# Altium PCB 002-0081 Rev -_wrong_layout.PcbDoc
Units mil, origin at the board's own origin, x right, y up, seen from the top; angles counter-clockwise.
Board outline 2675 x 3040 mil, 2 copper layers (Top Layer, Bottom Layer), stack 21 mil thick; 61 components, 35 nets, 171 pads, 34 vias.
Unrouted connection lines stored in the file: 23.
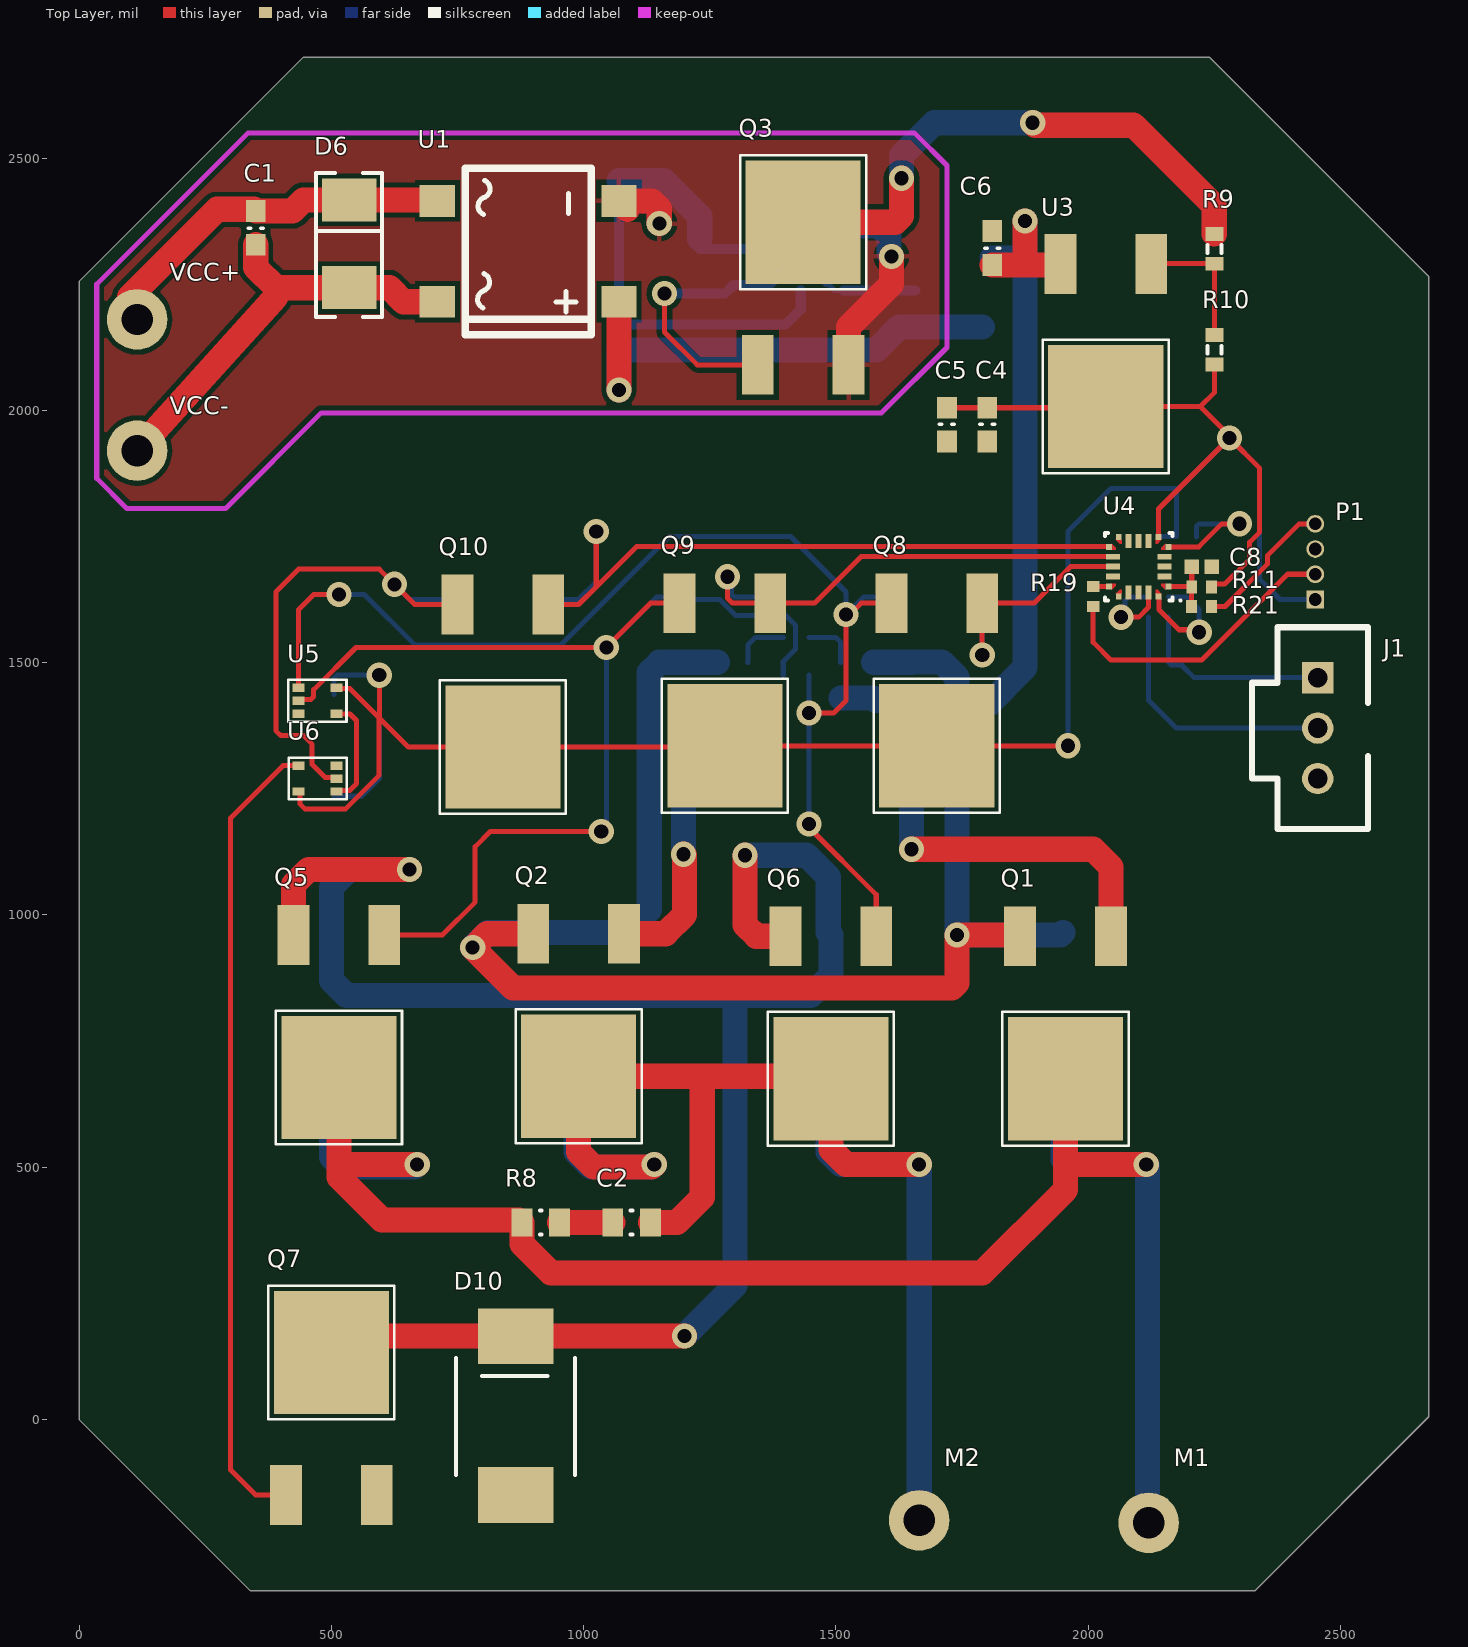
[diagram p0: Top Layer view]
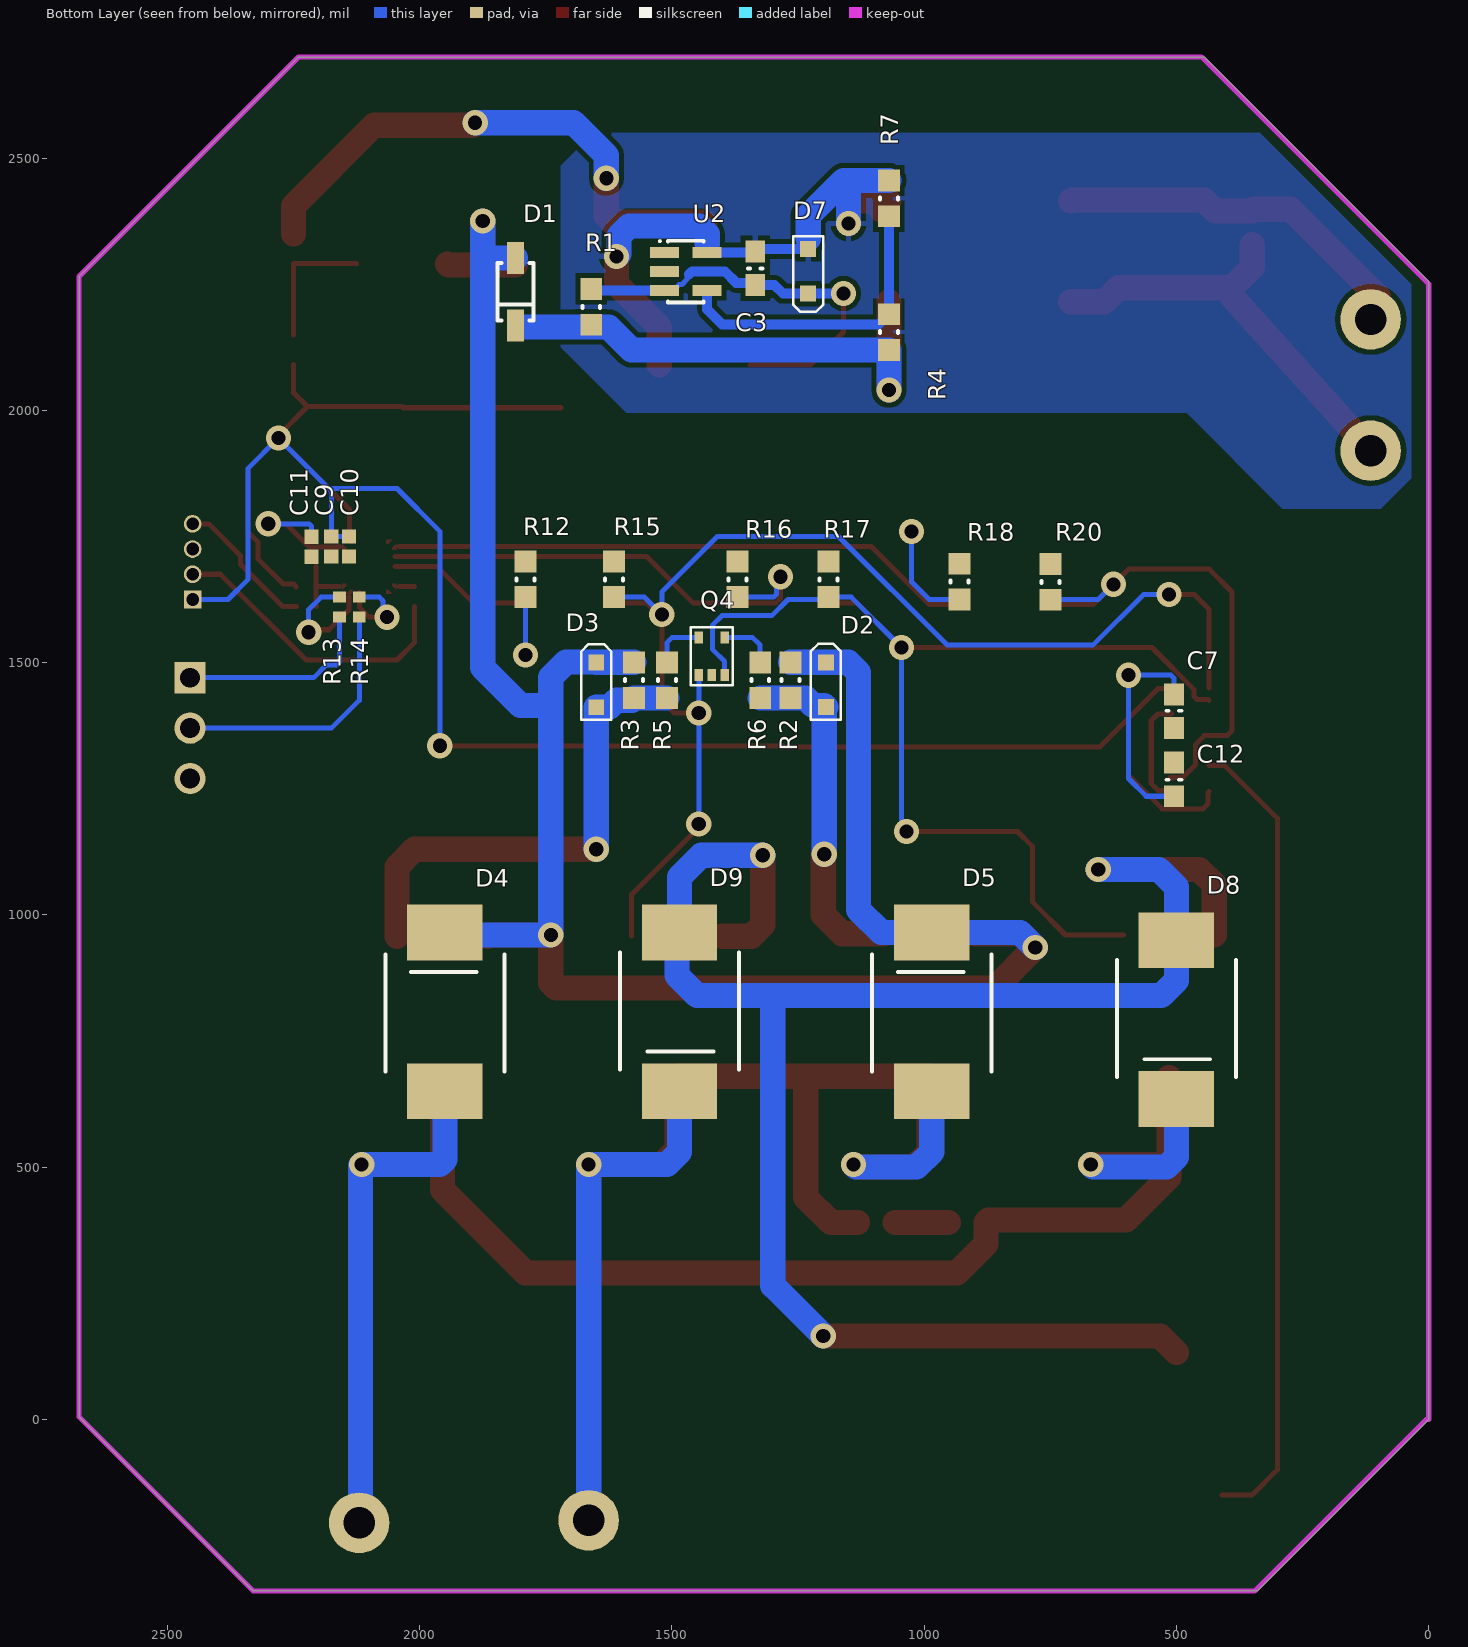
[diagram p1: Bottom Layer view, seen from below]

## Layer stack, top to bottom
Top Solder: solder mask 0.4, Solder Resist, Dk 3.5
Top Layer: signal copper 1.4
Dielectric 2: prepreg 2.8, PP-006, Dk 4.1
Dielectric 1: dielectric 12.6, FR-4, Dk 4.8
Dielectric 3: prepreg 2.8, PP-006, Dk 4.1
Bottom Layer: signal copper 1.4
Bottom Solder: solder mask 0.4, Solder Resist, Dk 3.5

## Board outline
340,-340 0,0 0,2255 445,2700 2240,2700 2675,2265 2675,5 2330,-340

## Design rules (kind name [scope] priority, off if disabled: settings)
Clearance Clearance_2 [HasFootprint('UFQFPN20_V')] p1: gap=10 ignorepadtopadclearanceinfootprint=TRUE except(0: Arc-Poly Arc-Region Track-Poly Track-Region SMDPad-Poly SMDPad-Region THPad-Poly THPad-Region Via-Poly Via-Region Fill-Poly Fill-Region Poly-Poly Poly-Region Region-Region; 7: Track-SMDPad)
Clearance Clearance_3 [HasFootprint('SOT-353') vs HasFootprint('SOT-353')] p2: gap=10 ignorepadtopadclearanceinfootprint=TRUE except(0: Arc-Hole Track-Hole SMDPad-Hole THPad-Hole Via-Hole Fill-Hole Poly-Hole Region-Hole Text-Hole)
Clearance Clearance_1 [All] p3: gap=10 ignorepadtopadclearanceinfootprint=FALSE except(0: Arc-Hole Track-Hole SMDPad-Hole THPad-Hole Via-Hole Fill-Hole Poly-Hole Region-Hole Text-Hole)
PolygonConnect [All] p1: connectstyle=Relief reliefconductorwidth=10 reliefentries=4 polygonreliefangle="90 Angle" airgapwidth=10
RoutingVias [All] p1: holewidth=28 width=50 viastyle="Through Hole" minholewidth=28 minwidth=50 maxholewidth=28 maxwidth=50
SilkToSolderMaskClearance SilkToSolderMaskClearance_1 [IsPad] p1: minsilkscreentomaskgap=7 clearancetoexposedcopper=TRUE
SilkToSolderMaskClearance [HasFootprint('UFQFPN20_V')] p2: minsilkscreentomaskgap=7 clearancetoexposedcopper=TRUE
SolderMaskExpansion [All] p1: expansion=4
Width [All] p1: maxlimit=80 minlimit=10 preferedwidth=10
29 further rules are at their usual default settings.

## Components (designator, comment, footprint, x,y, rotation, side; value= is the part's Value field where it differs from the comment)
C1 "0.01 UF, 50V" 0603 350,2395 r270 top
C2 "Cap" RESC0805(2012)_N 1095,390 r180 top value="0.1uF 100V"
C3 "Cap" 0603 1335,2315 r270 bottom value="1000pF 50V"
C4 "Cap" 0603 1800,1938.07 r90 top value="0.1uF 50V"
C5 "Cap" 0603 1720,1938.07 r90 top value="1uF 50V"
C6 "Cap" 0603 1810,2355 r270 top value="0.1uF 50V"
C7 "Cap" 0603 505,1370 r90 bottom value="0.1uF, 10V"
C8 "Cap" CAPC0402(1005)60_M 2225,1690 r180 top value=0.1uF
C9 "Cap" CAPC0402(1005)60_M 2214.37,1729.37 r90 bottom value=0.68uF
C10 "Cap" CAPC0402(1005)60_M 2140,1730 r90 bottom value=0.1uF
C11 "Cap" CAPC0402(1005)60_M 2175,1730 r90 bottom value=1uF
C12 "Cap" 0603 505,1301.93 r270 bottom value="0.1uF, 10V"
D1 "MBR0540" SOD123/X.85 1810,2235 r270 bottom
D2 "MM3Z8V2B" SOD-323F 1195,1411.85 r90 bottom
D3 "MM3Z8V2B" SOD-323F 1650,1411.42 r90 bottom
D4 "SK510L-TP" SMC 1950,650.04 r90 bottom
D5 "SK510L-TP" SMC 985,650.04 r90 bottom
D6 "TVS DIODE 28VWM 45.4VC SMB" "108x85 Space 89 Diode" 535,2330 r90 top
D7 "MM3Z8V2B" SOD-323F 1230,2320 r270 bottom
D8 "SK510L-TP" SMC 500,949.96 r270 bottom
D9 "SK510L-TP" SMC 1485,965 r270 bottom
D10 "SK510L-TP" SMC 865,-150 r90 top
J1 "RS232 Conn" SCON3/.10 2455,1470 r90 top
P1 "4 Pin Connector" "4 PIN IN-LINE" 2450,1625 r180 top
Q1 "AOD4189" "DPAK (TO-252-3)" 2045,957.68 r180 top
Q2 "AOD4189" "DPAK (TO-252-3)" 1080,962.68 r180 top
Q3 "FQD16N25CTM" "DPAK (TO-252-3)" 1345,2090 r0 top
Q4 "DMN32D2LDF-7" SOT-353 1395.6,1550 r0 bottom
Q5 "AOD454A" "DPAK (TO-252-3)" 605,960 r180 top
Q6 "AOD454A" "DPAK (TO-252-3)" 1580,957.68 r180 top
Q7 "AOD454A" "DPAK (TO-252-3)" 410,-150 r0 top
Q8 "AOD454A" "DPAK (TO-252-3)" 1790,1617.68 r180 top
Q9 "AOD454A" "DPAK (TO-252-3)" 1370,1617.68 r180 top
Q10 "AOD454A" "DPAK (TO-252-3)" 930,1615 r180 top
R1 "Res3" RESC0603(1608)_M 1660,2205 r270 bottom value=1K
R2 "Res1" RESC0603(1608)_M 1265,1465 r270 bottom value=10K
R3 "Res1" RESC0603(1608)_M 1575,1465 r270 bottom value=10K
R4 "Res1" RESC0603(1608)_M 1070,2155 r90 bottom value=100K
R5 "Res1" RESC0603(1608)_M 1510,1465 r270 bottom value=1K
R6 "Res1" RESC0603(1608)_M 1325,1465 r90 bottom value=1K
R7 "Res1" RESC0603(1608)_M 1070,2420 r90 bottom value=3.3K
R8 "Res1" RESC0805(2012)_N 915,390 r180 top value="49.9 Ohm"
R9 "Res3" J1-0603 2250,2320 r270 top value=10K
R10 "Res3" J1-0603 2250,2120 r270 top value=3.3K
R11 "Res1" RESC0402(1005)_N 2225,1650 r0 top value=1k
R12 "Res1" RESC0603(1608)_M 1790,1665 r90 bottom value=10K
R13 "Res1" RESC0402(1005)_N 2159.06,1610 r270 bottom value=221
R14 "Res1" RESC0402(1005)_N 2119.68,1610 r270 bottom value=221
R15 "Res1" RESC0603(1608)_M 1615,1665 r90 bottom value=10K
R16 "Res1" RESC0603(1608)_M 1370,1665 r90 bottom value=10K
R17 "Res1" RESC0603(1608)_M 1190,1665 r90 bottom value=10K
R18 "Res1" RESC0603(1608)_M 930,1660.43 r90 bottom value=10K
R19 "Res1" RESC0402(1005)_N 2010,1630.94 r270 top value=100
R20 "Res1" RESC0603(1608)_M 750,1660 r90 bottom value=10K
R21 "Res1" RESC0402(1005)_N 2224.68,1611.26 r0 top value=100
U1 "DF01S" "Rectifier -DF005S" 890,2315 r270 top
U2 "LMV431ACM5/NOPB" DBV005 1515,2312.4 r270 bottom
U3 "LM317MDTXM" "DPAK (TO-252-3)" 2125,2290 r180 top
U4 "STM8S003F3_1" UFQFPN20_V 2100,1690 r180 top
U5 "74AHC1G86SE-7" SOT-353 510,1398.82 r90 top
U6 "74AHCT1G08SE-7" SOT-353 435.2,1295.59 r270 top

## Footprints (in the part's own frame and the unit in brackets; to place one, negate y for a bottom-side part, rotate by r counter-clockwise, add the part's x,y. Pads: shape width x height; smd on the part's side, far side on the other; paste and mask are expansions set on the pad)
"4 PIN IN-LINE" [mil]
  rect 35x35 hole 25: 1(0,0)
  round 35 hole 25: 2(0,-50) 3(0,-100) 4(0,-150)
"108x85 Space 89 Diode" [mil]
  rect 85x108 smd: 1(-87,0) 2(87,0)
  silkscreen extent -145,-65 140,65
0603 [mm] "1.6 x .81 0603 with position tab for component rotation reference"
  rect 1.1x1 smd: 1(0,0) 2(1.7,0)
  silkscreen extent 0.86,-0.38 0.86,0.38
CAPC0402(1005)60_M [mm] "Chip Capacitor, Body 1.0x0.5mm, Height 0.6mm, IPC Low Density"
  rect 0.72x0.72 smd: 1(-0.5,0) 2(0.5,0)
  body extent -0.55,-0.3 0.55,0.3, height 0.6
DBV005 [mm]
  rect 0.55x1.45 smd: 1(0,0) 2(0.95,0) 3(1.9,0) 4(1.9,2.15) 5(0,2.15)
  silkscreen extent -0.62,-0.28 2.5,1.97
"DPAK (TO-252-3)" [mm]
  rect 1.6x3 smd: 1(0,0) 3(4.572,0)
  rect 5.8x6.2 smd: 2(2.286,7.18)
  silkscreen extent -0.89,3.81 5.46,10.54
J1-0603 [mm] "Chip Resistor, Body 1.6x0.8mm, IPC High Density"
  rect 0.7x0.9 smd: 1(-0.75,0) 2(0.75,0)
  silkscreen extent -0.2,-0.35 0.2,0.35, body extent -0.85,-0.48 0.85,0.48, height 0.9
"Rectifier -DF005S" [mil] "50 Amp Pk - 50 V"
  rect 63x70 smd: +(100,180) -(-100,180) AC1(-100,-180) AC2(100,-180)
  silkscreen extent -165,-125 165,125
RESC0402(1005)_N [mm] "Chip Resistor, Body 1.0x0.5mm, IPC Medium Density"
  rect 0.55x0.65 smd: 1(-0.5,0) 2(0.5,0)
  body extent -0.52,-0.27 0.53,0.28, height 0.4
RESC0603(1608)_M [mm] "Chip Resistor, Body 1.6x0.8mm, IPC Low Density"
  rect 1.1x1.1 smd: 1(-0.9,0) 2(0.9,0)
  silkscreen extent -0.05,-0.45 0.05,0.45, body extent -0.85,-0.47 0.85,0.47, height 0.6
RESC0805(2012)_N [mm] "Chip Resistor, Body 2.0x1.3mm, IPC Medium Density"
  rect 1.05x1.4 smd: 1(-0.95,0) 2(0.95,0)
  silkscreen extent -0.05,-0.6 0.05,0.6, body extent -1.1,-0.67 1.1,0.68, height 0.7
SCON3/.10 [mil]
  rect 62x62 hole 39.37: 1(0,0)
  round 62 hole 39.37: 2(-100,0) 3(-200,0)
  silkscreen extent -300,-100 100,130
SMC [mm] "SMC; Case 403 Body 6.8 x 5.8 mm (LxW)"
  rect 2.8x3.8 smd: 1(0,0) 2(8,0)
  silkscreen extent 1,-3 6.9,3
SOD123/X.85 [mm]
  rect 1.6x0.85 smd: 1(-1.7,0) 2(1.7,0)
  silkscreen extent -1.45,-0.9 1.45,0.9
SOD-323F [mm]
  rect 0.8x0.8 smd: 1(0,0) 2(2.25,0)
  silkscreen extent -0.64,-0.76 3.17,0.76
SOT-353 [mm]
  rect 0.42x0.6 smd: 1(1.3,1.9) 2(0.65,1.9) 3(0,1.9) 4(0,0) 5(1.3,0)
  silkscreen extent -0.41,-0.51 1.7,2.41
UFQFPN20_V [mm] "QFN, 20-Leads, Body 3x3mm, Pitch 0.5mm, ST Recommended"
  rect 0.3x0.3 smd paste+0 mask-0.15: 1(-1.5,1) 5(-1.5,-1) 6(-1,-1.5) 10(1,-1.5) 11(1.5,-1) 15(1.5,1) 16(1,1.5) 20(-1,1.5)
  rect 0.7x0.3 smd paste+0 mask+0.06: 2(-1.3,0.5) 3(-1.3,0) 4(-1.3,-0.5) 12(1.3,-0.5) 13(1.3,0) 14(1.3,0.5)
  rect 0.3x0.7 smd paste+0 mask+0.06: 7(-0.5,-1.3) 8(0,-1.3) 9(0.5,-1.3) 17(0.5,1.3) 18(0,1.3) 19(-0.5,1.3)
  Top Layer region: 0.85,1.15 0.85,1.35 1.15,1.35 0.95,1.15
  Top Layer region: -0.85,1.15 -0.85,1.35 -1.15,1.35 -0.95,1.15
  Top Layer region: 1.15,0.85 1.35,0.85 1.35,1.15 1.15,0.95
  Top Layer region: 0.85,-1.15 0.85,-1.35 1.15,-1.35 0.95,-1.15
  Top Layer region: -1.15,-0.85 -1.35,-0.85 -1.35,-1.15 -1.15,-0.95
  Top Layer region: 1.15,-0.85 1.35,-0.85 1.35,-1.15 1.15,-0.95
  Top Layer region: -0.85,-1.15 -0.85,-1.35 -1.15,-1.35 -0.95,-1.15
  Top Layer region: -1.15,0.85 -1.35,0.85 -1.35,1.15 -1.15,0.95
  silkscreen extent -2.15,-1.7 1.7,1.75, body extent -1.55,-1.55 1.55,1.55, height 0.6

## Part data
C1: library part CAP, "Cap Cer .01uf 50V 0603 RoHS", Manufacturer="Garrett Electronics Corporation", Part Number=X7R0603HTTD103K, PEM Part Number=EE-1293
C2: "Cap Cer 0.1uF 100V 10% X7R 0805", Part Number=CL21B104KCFSFNE, PEM Part Number=EE-1659
C3 C4 C6: "CAP Cer, 0.1uF, 50V, 0603 X7R, 10%", Manufacturer Part Number=06035C104KAT2A, PEM Part Number=EE-1425
C5: "CAP Cer, 1uF, 50V, 0603 X7R, 10%", Manufacturer Part Number=06035C104KAT2A, PEM Part Number=EE-1425
C7 C12: "Cap Cer 0.1uF 10V 10% X5R 0402", Part Number=LMK105BJ104KV-F, PEM Part Number=EE-1661
C8 C10: "Cap Cer 0.1uF 10V 10% X5R 0402", Manufacturer="Taiyo Yuden", Part Number=LMK105BJ104KV-F, PEM Part Number=EE-1661
C9: "Cap cer 0.68uF 6.3V 5% X6S 0402", Manufacturer="Samsung Electro-Mechanics", Part Number=CL05X684JQ5NNNC, PEM Part Number=EE-1673
C11: "Cap Cer 1uF 10V 10% X5R 0402", Manufacturer="Taiyo Yuden", Part Number=LMK105BJ104KV-F, PEM Part Number=EE-1661
D1: library part "D Schottky", "DIODE SCHOTTKY 40V 500MA SOD123", Manufacturer Part Number=MBR0540-TP, PEM Part Number=EE-1290
D2 D3 D7: library part "D Zener", "DIODE ZENER 8.2V 200MW SOD323F", PEM Part Number=EE-1681, Manufacturer Part Number=MM3Z8V2B
D4 D5 D8 D9 D10: library part "D Schottky", "Diode Schottky 100V 5A SMC", Manufacturer Part Number=B540C-13-F, PEM Part Number=EE-1487
D6: library part "Dual Zener", Manufacturer="ON Semiconductor", Part Number=1SMB28CAT3G, PEM Part Number=EE-1771
J1: library part "Header 3", "CONN HDR VERT 3POS .100 TIN", Manufacturer="Phoenix Contact", Part Number=70543-0037, PEM Part Number=EE-1116, LatestRevisionDate=17-Jul-2002, LatestRevisionNote="Re-released for DXP Platform.", Publisher="Altium Limited"
P1: Manufacturer="Sullins Connector Solutions", Part Number=GRPB501VWVN-RC, PEM Part Number=EE-1855
Q1 Q2: library part MOSFET-P, "MOSFET P-CH 40V 40A TO252 DPAK", PEM Part Number=EE-1879, Manufacturer Part Number=AOD4189
Q3: library part MOSFET-N, "MOSFET N-CH 250V 16A D-PAK", PEM Part Number=EE-2068, Part Number=FQD16N25CTM
Q4: library part "MOSFET 2N-CH", "MOSFET 2N-CH 30V 0.4A SOT353", Manufacturer="Diodes Incorporated", PEM Part Number=EE-1876, Part Number=DMN32D2LDF-7
Q5 Q6 Q7 Q8 Q9 Q10: library part MOSFET-N, "MOSFET N-CH 40V 20A TO252", Manufacturer="Alpha & Omega Semiconductor Inc.", PEM Part Number=EE-1898, Part Number=AOD454A
R1: "Resistor", LatestRevisionDate=29-May-2009, LatestRevisionNote="IPC-7351 Footprint Added.", PackageDescription="Chip Resistor", PackageReference=J1-0603, Published=8-Jun-2000, Publisher="Altium Limited"
R2 R3 R12 R15 R16 R17 R18 R20: "Res 10K 0603 1% 1/10W RoHS", Part Number=RK73H1JTTD1002F, PEM Part Number=EE-1296
R4: "Res 464K 0603 1% 1/8W RoHS", Part Number=RK73H1JTTD1002F, PEM Part Number=EE-1296
R5 R6: "Res 1.0K 0603 1% 1/10W RoHS", Manufacturer Part Number=CRCW06031K00FKEA, PEM Part Number=EE-1297
R7: "RES 23.7K OHM 1/10W 1% 0603 SMD", Part Number=RK73H1JTTD1002F, PEM Part Number=EE-1296
R8: "Res 49.9R 0805 1% 1/8W", Manufacturer=Phycomp, Part Number=9C08052A49R9FKHFT, PEM Part Number=EE-1238
R9: "Res 10K 0603 1% 1/8W RoHS", LatestRevisionDate=29-May-2009, LatestRevisionNote="IPC-7351 Footprint Added.", PackageDescription="Chip Resistor", PackageReference=J1-0603, Published=8-Jun-2000, Publisher="Altium Limited"
R10: "Res 3.3K 0603 1% 1/8W RoHS", LatestRevisionDate=29-May-2009, LatestRevisionNote="IPC-7351 Footprint Added.", PackageDescription="Chip Resistor", PackageReference=J1-0603, Published=8-Jun-2000, Publisher="Altium Limited"
R11: "Res 1K 0402 1% 1/16W RoHS", Manufacturer=Vishay, Part Number=CRCW04021K00FKED, PEM Part Number=EE-1581
R13 R14: "Res 1K 0603 1% 1/10W RoHS", Part Number=RK73H1JTTD1002F, PEM Part Number=EE-1296
R19 R21: "Res 100R 0402 1% 1/16W RoHs", Manufacturer=Yageo, Part Number=RC0402FR-07100RL, PEM Part Number=EE-1588
U1: library part DF005S, "RECT BRIDGE GPP 1A 100V DFS", Manufacturer="Diodes Incorporated", Part Number=DF01S-T, PEM Part Number=EE-1797
U2: library part TL431IDBVR, "IC VREF SHUNT ADJ SOT23-5", PEM Part Number=EE-1900, Part Number=LMV431ACM5/NOPB
U3: library part LM317D2T(3), "SMT, IC, Adjust Voltage Reg, 0.5A, 3TERM, TO-252, 40V diff max", Manufacturer="Fairchild Semiconductor", PEM Part Number=EE-1248, Part Number=LM317MDTXM
U4: "MCU 8BIT 8KB 16MHZ 20-UFQFPN", Manufacturer=STMicroelectronics, Part Number=STM8S003F3U6TR, PEM Part Number=EE-1655
U5: library part NC7SZ08, "IC 2-input AND gate SC-70-5", Manufacturer="Diodes Incorporated", Part Number=74AHCT1G08SE-7, PEM Part Number=EE-1801
U6: library part NC7SZ08, "IC 2-input AND gate SC-70-5", Manufacturer="Diodes Incorporated", PEM Part Number=EE-1801, Part Number=74AHCT1G08SE-7

## Free pads (board coordinates)
  round 120 hole 62: 1(115,2180) 2(115,1920) 3(1665,-200) 4(2120,-205)

## Via types
v1: diameter 50, hole 28, Top Layer to Bottom Layer, 34 vias

## Nets (pads, with @x,y where several pads share a name; then routed paths per layer and width w, separated by ;. In a path a pad name is that pad's centre, name@x,y a point inside that pad or via, vN(x,y) a via of type N, cw(c..) or ccw(c..) an arc to the next point about the centre after c; other vN are vias at no path point)
5V: C4.2 C5.2 C7.2 C10.2 C11.2 C12.2 P1.1 Q8.2 Q9.2 Q10.2 R10.2 R11.2 U3.2 U4.6 U5.5 U6.5 | length 5041.9
  Top Layer w10: U6.5 437.52,1242.09 437.52,1220 447.52,1210 528.28,1210 594.74,1276.46 594.74,1390.26 ; U5.5 511.81,1448.19 536.81,1448.19 594.74,1390.26 ; v1(595,1475) 595,1390.51 594.74,1390.26 ; C5.2 C4.2 2032.68,2005 U3.2 2222.32,2007.32 ; v1(1960,1335) Q8.2 Q9.2 1277.32,1332.32 Q10.2 652.68,1332.32 594.74,1390.26 ; U4.6 2139.37,1804.37 v1(2280,1945) ; R11.2 2250.2,1655.51 2270.51,1655.51 2320,1705 2320,1738.43 2340,1758.43 2340,1885 v1(2280,1945) ; R10.2 2250,2035 2222.32,2007.32 ; 2222.32,2007.32 2280,1949.65 v1(2280,1945)
  Bottom Layer w10: C12.2 560,1235 595,1270 v1(595,1475) 510.86,1475 505,1469.14 C7.2 ; v1(1960,1335) 1960,1760 2045,1845 2180,1845 ; C10.2 C11.2 2175,1840 2180,1845 ; P1.1 2380,1625 2340,1665 2340,1885 v1(2280,1945) 2180,1845
12-24V: C6.2 D1.1 D2.2 D3.2 D4.2 D5.2 Q1.3 Q2.3 R2.1 R3.1 U3.3 | length 4588.4
  Top Layer w50: Q2.3 808.89,962.68 781.21,935 v1(780,935) 860,855 1730,855 1740,865 v1(1740,960) 1862.68,960 Q1.3 ; C6.2 1875,2288.07 ; v1(1875,2375) 1875,2288.07 ; U3.3 1943.07,2288.07 1875,2288.07
  Bottom Layer w50: v1(780,935) 810,965 D5.2 1085,965 1130,1010 1130,1480.43 1150,1500.43 D2.2 R2.1 ; R3.1 1649.57,1500.43 D3.2 1650.95,1500.95 1710,1500.95 1740,1470.95 1740,1415 ; D1.1 1865,2301.93 1875,2311.93 ; v1(1875,2375) 1875,2311.93 ; D4.2 1945,960 v1(1740,960) 1740,1415 ; 1740,1415 1800,1415 1875,1490 1875,2311.93
CCW_MCU: Q9.1 R16.1 U4.12 | length 966
  Top Layer w10: v1(1285,1670) 1285,1627.68 1295,1617.68 Q9.1 1457.68,1617.68 1550,1710 U4.12@2048.82,1710
  Bottom Layer w10: v1(1285,1670) 1292.65,1662.35 1292.65,1635.42 1298.51,1629.57 R16.1
CCW_MOT: Q4.3 Q5.1 Q9.3 R17.1 U5.2 | length 2339.4
  Top Layer w10: U5.2 437.52,1426.73 459.14,1426.73 465,1432.59 465,1446.29 548.71,1530 v1(1045,1530) 1132.68,1617.68 Q9.3 ; Q5.1 720,960 785,1025 785,1135 815,1165 v1(1035,1165)
  Bottom Layer w10: v1(1035,1165) 1045,1175 v1(1045,1530) 1144.57,1629.57 R17.1 1194.57,1625 1270,1625 1302.09,1592.91 1400.9,1592.91 1420,1573.81 1420,1526.41 1395.6,1502.01 Q4.3
CW_MCU: Q8.1 R12.1 U4.13 | length 506
  Top Layer w10: v1(1790,1515) Q8.1 1892.68,1617.68 1965,1690 U4.13
  Bottom Layer w10: v1(1790,1515) R12.1
CW_MOT: Q4.1 Q6.1 Q8.3 R15.1 U5.1 | length 2508.3
  Top Layer w10: U5.1 435.2,1605.2 465,1635 v1(515,1635) ; v1(1446.78,1180) 1446.78,1173.22 1580,1040 Q6.1 ; v1(1446.78,1400) 1495.59,1400 1520,1424.41 v1(1520,1595) 1527.32,1595 1550,1617.68 Q8.3
  Bottom Layer w10: v1(515,1635) 565,1635 665,1535 955,1535 1169.69,1749.69 1410,1749.69 1520,1639.69 v1(1520,1595) 1554.57,1629.57 R15.1 ; v1(1446.78,1180) v1(1446.78,1400) Q4.1
ENABLE: U5.4 U6.1 | length 218.4
  Top Layer w10: U6.1 509.41,1245 511.14,1246.73 536.73,1246.73 550,1260 550,1385 536.81,1398.19 510.63,1398.19 U5.4
GND: C4.1 C5.1 C6.1 C7.1 C8.1 C9.1 C10.1 C11.1 C12.1 D10.1 J1.3 P1.3 Q3.2 Q4.2 Q7.3 R9.1 R12.2 R15.2 R16.2 R17.2 R18.2 R20.2 U4.4 U5.3 U6.3 | length 1090.8
  Top Layer w50: Q3.2 1617.68,2372.68 1630,2385 v1(1630,2460) ; v1(1890,2570) 1895,2565 2090,2565 2250,2405 R9.1
  Bottom Layer w50: v1(1630,2460) 1630,2505 1695,2570 v1(1890,2570)
M1: D4.1 D8.2 pad.4 Q1.2 Q5.2 R8.2 | length 3660.1
  Top Layer w50: Q5.2 515,513.28 ; v1(670,505) 533.28,505 532.43,504.14 524.14,504.14 515,513.28 ; Q1.2 1955,505 ; v1(2115,505) 1955,505 ; 515,513.28 515,480 600,395 872.6,395 R8.2 877.6,347.4 935,290 1790,290 1955,455 1955,505
  Bottom Layer w10: v1(2115,505) v1@2117.5,502.5 ; pad.4@2117.5,-202.5 pad.4
  Bottom Layer w50: D8.2 500,520 520,500 665,500 v1(670,505) ; D4.1 1950,515 1960,505 v1(2115,505) ; pad.4@2117.5,-202.5 v1@2117.5,502.5
M2: C2.1 D5.1 D9.2 pad.3 Q2.2 Q6.2 | length 2812.2
  Top Layer w50: C2.1 1185,390 1235,440 1235,680 ; v1(1140,505) 1135,500 1020,500 990,530 Q2.2 1235,680 ; v1(1665,505) 1520,505 1490,535 Q6.2 1485,680 1235,680
  Bottom Layer w50: D5.1 985,530 1015,500 1135,500 v1(1140,505) ; D9.2 1485,530 1510,505 v1(1665,505) pad.3
NetC2_2: C2.2 R8.1 | length 105.2
  Top Layer w50: R8.1 C2.2
NetC3_1: C3.1 D7.1 Q3.3 R7.2 U1.- U2.5 | length 1167.9
  Top Layer w50: U1.-@1086.72,2398.28 U1.- 1135,2415 1150,2400 v1(1150,2370) ; Q3.3 1525,2165 1610,2250 v1(1610,2305)
  Bottom Layer w10: C3.1@1330,2320 C3.1 C3.1@1337.6,2312.4
  Bottom Layer w20: D7.1 C3.1@1330,2320 ; C3.1@1337.6,2312.4 U2.5@1430,2312.4
  Bottom Layer w50: R7.2 1159.57,2455.43 ; v1(1150,2370) 1150,2445.87 1159.57,2455.43 ; 1230,2340 1230,2385 1159.57,2455.43 ; 1430,2330 1430,2349.29 1445.71,2365 1585,2365 1605,2345 1605,2310 v1(1610,2305)
NetC3_2: C3.2 D7.2 Q3.1 R1.1 U2.3 | length 833.5
  Top Layer w10: v1(1160,2231.42) 1160,2155 1225,2090 Q3.1
  Bottom Layer w10: 1464.14,2275 1470,2269.14 1470,2259.42 1480.24,2249.17 1485.71,2249.17 1497.28,2237.6 U2.3 ; R1.1@1657.17,2237.6 R1.1
  Bottom Layer w20: v1(1160,2231.42) D7.2 1280,2231.42 1296.65,2248.07 C3.2 1339.43,2252.5 1372.5,2252.5 1395,2275 1460.6,2275 1466.46,2269.14 ; U2.3 R1.1@1657.17,2237.6
NetC9_2: C9.2 U4.5 | length 269.8
  Top Layer w10: U4.5@2159.96,1730.28 U4.5 2219.37,1729.37 2265,1775 v1(2300,1775)
  Bottom Layer w10: C9.2 2214.37,1770 2219.37,1775 v1(2300,1775)
NetD1_2: D1.2 R1.2 R4.1 U1.+ | length 993.4
  Top Layer w50: v1(1070,2040) U1.+
  Bottom Layer w50: v1(1070,2040) R4.1 1580,2119.57 1625.43,2165 1790,2165
NetD2_1: D2.1 Q2.1 R2.2 R6.1 | length 687.1
  Top Layer w50: Q2.1 1162.68,962.68 1200,1000 1200,1118.15 v1(1198.15,1120)
  Bottom Layer w50: v1(1198.15,1120) 1198.15,1408.7 D2.1 1198.15,1415 1220,1415 1235,1430 1264.57,1430 R2.2 R6.1
NetD3_1: D3.1 Q1.1 R3.2 R5.2 | length 975.8
  Top Layer w50: v1(1650,1130) 2010,1130 2045,1095 Q1.1
  Bottom Layer w50: R5.2 R3.2 1579.25,1425.32 1610,1425.32 1623.46,1411.85 1649.57,1411.85 D3.1 v1(1650,1130)
NetD8_1: D8.1 D9.1 D10.2 Q5.3 Q6.3 Q7.2 | length 3753.1
  Top Layer w50: Q5.3 425,1060 455,1090 v1(655,1090) ; Q7.2 532.28,164.96 D10.2 D10.2 v1(1200,165) ; v1(1320,1118.15) 1320,980 1342.32,957.68 Q6.3
  Bottom Layer w50: v1(655,1090) 535,1090 500,1055 D8.1 500,870 530,840 1300,840 ; v1(1200,165) 1300,265 1300,840 ; v1(1320,1118.15) 1441.85,1118.15 1485,1075 D9.1 1490,960 1490,880 1450,840 1300,840
NetP1_2: P1.2 R19.2 | length 596.2
  Top Layer w10: R19.2 2010,1540 2045,1505 2225,1505 2395,1675 P1.2
NetP1_4: P1.4 R21.2 | length 283.3
  Top Layer w10: R21.2 2271.26,1611.26 2355,1695 2355,1711.82 2418.18,1775 P1.4
NetQ4_4: Q4.4 R6.2 | length 111.9
  Bottom Layer w10: R6.2@1325.63,1499.8 R6.2 1325.63,1501.06 1325.63,1535 1340.63,1550 Q4.4
NetQ4_5: Q4.5 R5.1 | length 107.8
  Bottom Layer w10: Q4.5 1499.37,1550 1509.37,1540 1509.37,1499.8 R5.1
NetR4_2: R4.2 R7.1 U2.4 | length 613
  Bottom Layer w20: R7.1 R4.2 1090.43,2170 1400.35,2170 1430.35,2200 U2.4
NetR9_2: R9.2 R10.1 U3.1 | length 266.1
  Top Layer w10: U3.1 2125.47,2290.47 R9.2 R10.1
NetR13_1: R13.1 U4.20 | length 240.9
  Top Layer w10: U4.20@2139.68,1630.94 2140,1630.63 2140,1605 2180,1565 2215,1565 v1(2220,1560)
  Bottom Layer w10: R13.1 2195.32,1629.68 2220,1605 v1(2220,1560)
NetR14_1: R14.1 U4.19 | length 177.6
  Top Layer w10: v1(2065,1590) 2100,1590 2119.68,1609.68 U4.19
  Bottom Layer w10: v1(2065,1590) 2072.65,1597.65 2072.65,1622.34 2080,1629.68 R14.1
PWM_MCU: Q10.1 R18.1 U4.11 | length 1477.9
  Top Layer w10: Q10.1 990,1615 1025.31,1650.31 ; v1(1025,1760) 1025,1650.63 1025.31,1650.31 ; U4.11@2040.94,1730 1105,1730 1025.31,1650.31
  Bottom Layer w10: R18.1 990,1625 1025,1660 v1(1025,1760)
PWM_MOT: Q10.3 R20.1 U6.2 | length 1006.3
  Top Layer w10: U6.2@512.32,1272.32 U6.2 507.68,1272.32 487.68,1272.32 462.01,1297.99 462.01,1337.99 445,1355 400,1355 390,1365 390,1640 435,1685 595,1685 v1(625,1655) 665,1615 Q10.3
  Bottom Layer w10: v1(625,1655) 655.43,1624.57 R20.1
PWM_MOT_IN: Q7.1 U6.4 | length 1600.5
  Top Layer w10: Q7.1 350,-150 300,-100 300,1191.46 404.13,1295.59 U6.4
RESET: C8.2 R11.1 R21.1 U4.1 | length 125.3
  Top Layer w10: U4.1 2159.37,1650.32 2204.69,1650.32 R11.1@2205.16,1649.84 ; R21.1 2205.16,1611.42 R11.1@2205.16,1649.84 ; C8.2 R11.1 R11.1@2205.16,1649.84
RX: J1.1 R13.2 | length 398.1
  Bottom Layer w10: R13.2 2159.05,1500.95 2165,1495 2185,1495 2210,1470 J1.1
SWIM: R19.1 U4.15 | length 30.9
  Top Layer w10: R19.1 U4.15
TX: J1.2 R14.2 | length 523.2
  Bottom Layer w10: R14.2 2119.68,1425.32 2175,1370 J1.2
VCC+: C1.1 D6.2 pad.1 U1.AC1 | length 740.7
  Top Layer w50: pad.1 99.78,2224.78 273.28,2398.28 346.72,2398.28 C1.1 423,2395 445,2417 D6.2 708,2417 U1.AC1
VCC-: C1.2 D6.1 pad.2 U1.AC2 | length 861.9
  Top Layer w50: pad.2 390,2225 390,2243 ; C1.2 350,2283 390,2243 ; U1.AC2 643,2215 615,2243 D6.1 390,2243
pads on no net: U2.1 U2.2 U4.2 U4.3 U4.7 U4.8 U4.9 U4.10 U4.14 U4.16 U4.17 U4.18

## Polygon pours and split planes (outlines as drawn)
NetC3_1 on Top Layer "NET_C3_1_TOP" (solid, pour order 4): 95,1805 35,1865 35,2250 335,2550 1655,2550 1720,2485 1720,2124.53 1590.47,1995 480,1995 290,1805
NetC3_1 on Bottom Layer "NET_C3_1_BOTTOM" (solid, pour order 6): 95,1805 35,1865 35,2250 335,2550 1655,2550 1720,2485 1720,2124.53 1590.47,1995 480,1995 290,1805

## Keep-outs
Top Layer:
  region: 1385,2275
  lines w10: 35,1865 95,1805 290,1805 480,1995 1570,1995 1590.47,1995 1720,2124.53 1720,2465 1720,2485 1655,2550 335,2550 35,2250 35,1865
Bottom Layer:
  lines w10: 0,0 0,2250 450,2700 2240,2700 2675,2265 2675,5 2330,-340 345,-340 5,0

## Silkscreen, mask and mechanical layers (free items; w line width, h text height)
Top Overlay:
  text "VCC+" at 180,2245 h60
  text "VCC-" at 180,1980 h60
  text "M2" at 1715,-105 h60
  text "M1" at 2170,-105 h60